# EAGLE board Wheel Speed Sensor rev1.1 (EAGLE 9.5.0)
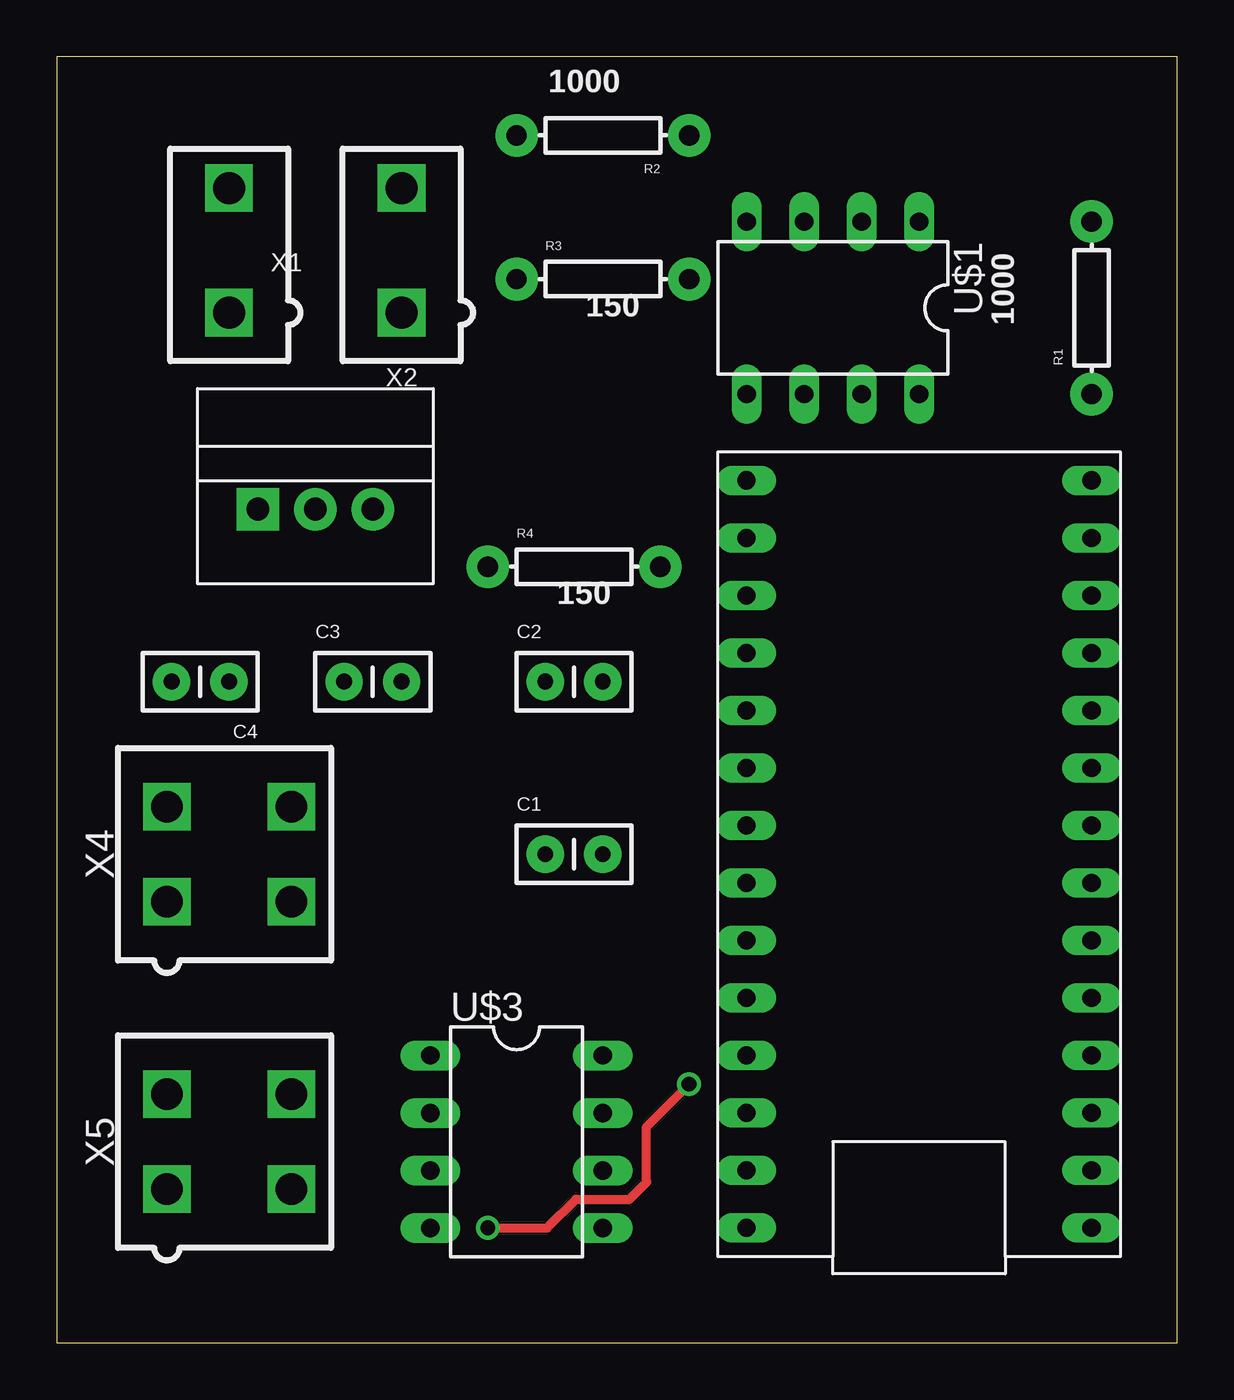
[diagram p0: board, top side]
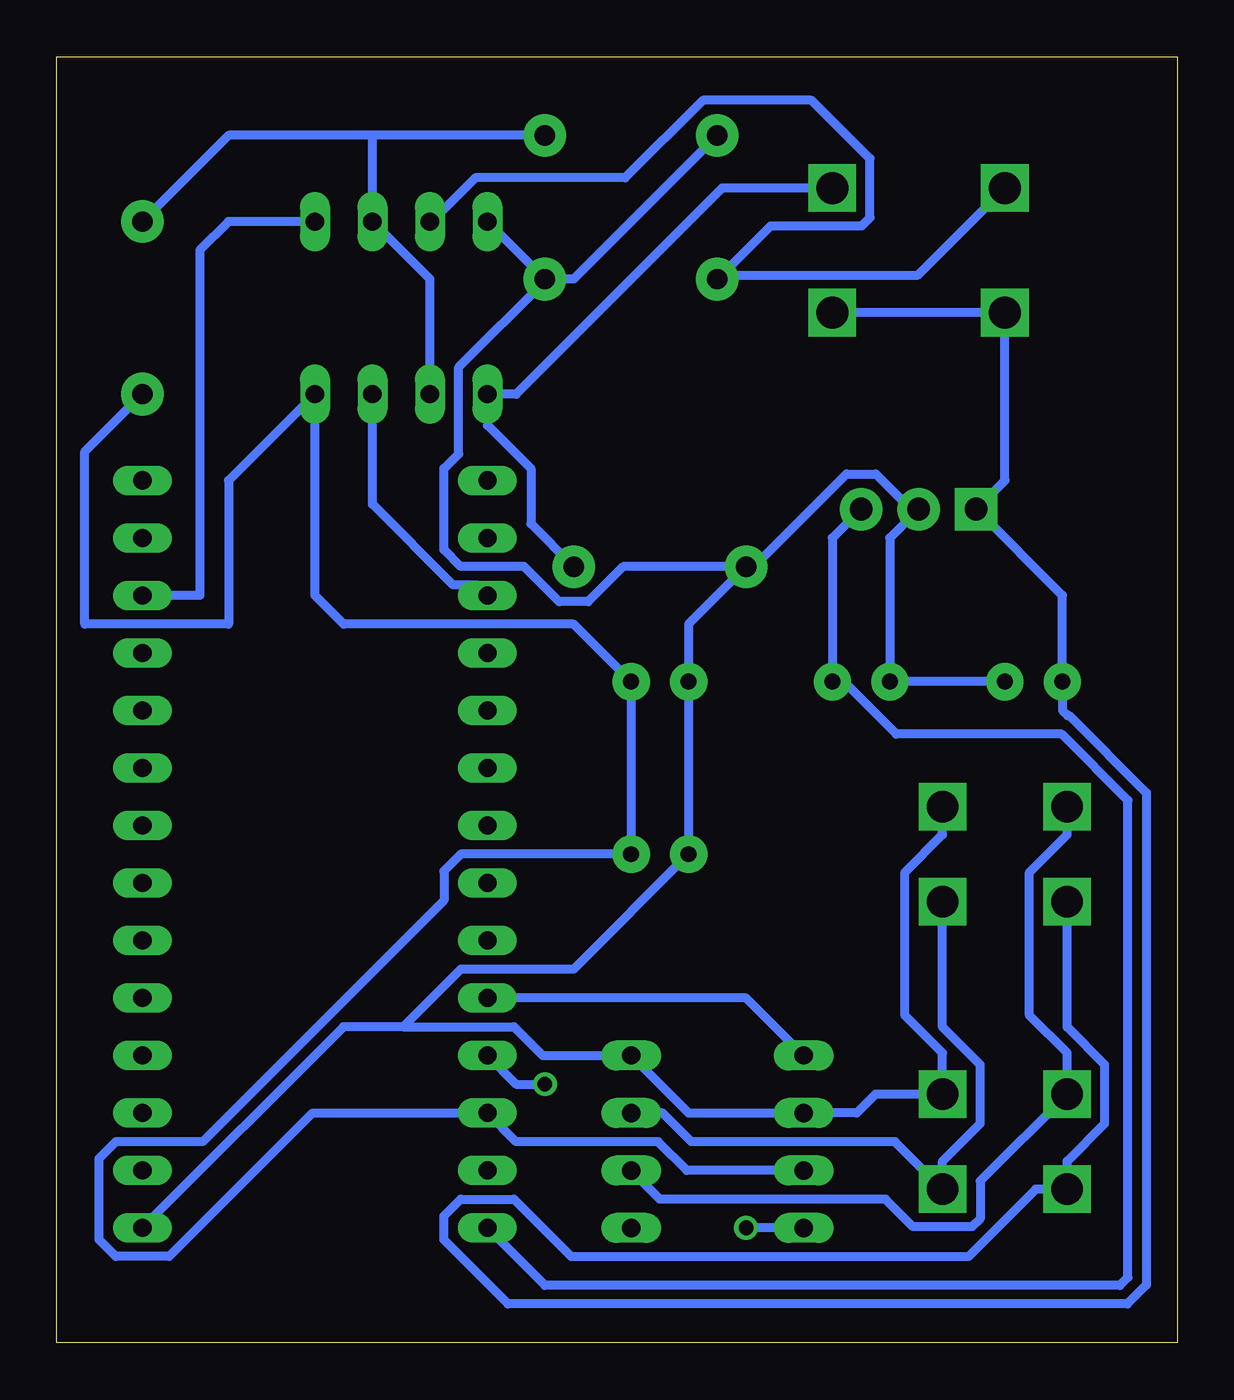
[diagram p1: board, bottom side, seen from below]

Size 49.51 x 56.82 mm. Coordinates in mm from the lower left corner, seen from the top.
Outline: 0,0 49.51,0 49.51,56.82 0,56.82 0,0
Copper layers (1*16): Top 0.035mm / dielectric 1.5mm / Bottom 0.035mm
Design rules "default *": minimum track width 16mil, minimum drill 0.35mm, track to track 16mil, track to pad 16mil, pad to pad 16mil, via to via 16mil, smd to smd 16mil, copper to edge 40mil, drill to drill 6mil, minimum pad ring 10mil, minimum via ring 8mil, stop-mask expansion 4mil, vias tented up to drill 0mil, thermal gap 10mil

## Footprints (pad centres in the part's own frame; a part is rotated, then mirrored left to right if it is on the bottom)
CAP-PTH-SMALLEZ = drill 0.7 pad 1.651: 1 0,0; 2 2.54,0
AXIAL-0.3 = drill 0.9 pad 1.88: P$1 -3.81,0; P$2 3.81,0
DIL08 = drill 0.813 long: 1 -3.81,-3.81; 2 -1.27,-3.81; 3 1.27,-3.81; 4 3.81,-3.81; 5 3.81,3.81; 6 1.27,3.81; 7 -1.27,3.81; 8 -3.81,3.81
TEENSY_3.2_SIMPLE = drill 0.8 long: 3.3V 16.51,29.21; A0 16.51,3.81; A1 16.51,6.35; A2 16.51,8.89; A3 16.51,11.43; A4 16.51,13.97; A5 16.51,16.51; A6 16.51,19.05; A7 16.51,21.59; A8 16.51,24.13; A9 16.51,26.67; AGND 16.51,31.75; D0(RX1) 1.27,31.75; D1(TX1) 1.27,29.21; D2 1.27,26.67; D3(CANTX) 1.27,24.13; D4(CANRX) 1.27,21.59; D5 1.27,19.05; D6 1.27,16.51; D7(RX3) 1.27,13.97; D8(TX3) 1.27,11.43; D9(RX2) 1.27,8.89; D10(TX2) 1.27,6.35; D11 1.27,3.81; D12 1.27,1.27; D13 16.51,1.27; GND 1.27,34.29; VIN 16.51,34.29
OKI-78SR = drill 1 pad 1.88 square: 1 -2.54,0 | drill 1 pad 1.88: 2 0,0; 3 2.54,0
MINIFIT_5566-2 = drill 1.4 square: 1 0,-2.75; 2 0,2.75
MINIFIT_5566-4 = drill 1.4 square: 1 2.1,-2.75; 2 -2.1,-2.75; 3 2.1,2.75; 4 -2.1,2.75

## Placement (x,y rotation side)
C1  1uF  [CAP-PTH-SMALLEZ]  21.59,21.59 0 top
C2  1uF  [CAP-PTH-SMALLEZ]  21.59,29.21 0 top
C3  [CAP-PTH-SMALLEZ]  12.7,29.21 0 top
C4  [CAP-PTH-SMALLEZ]  7.62,29.21 180 top
R1  1000  [AXIAL-0.3]  45.72,45.72 90 top
R2  1000  [AXIAL-0.3]  24.13,53.34 180 top
R3  150  [AXIAL-0.3]  24.13,46.99 0 top
R4  150  [AXIAL-0.3]  22.86,34.29 0 top
U$1  MCP6002PDIP  [DIL08]  34.29,45.72 180 top
U$2  TEENSY_3.2_SIMPLE  [TEENSY_3.2_SIMPLE]  46.99,39.37 180 top
U$3  MCP2551DIL  [DIL08]  20.32,8.89 270 top
U$4  OKI-78SR-5  [OKI-78SR]  11.43,36.83 0 top
X1  Sensor 1  [MINIFIT_5566-2]  7.62,48.26 0 top
X2  Sensor 2  [MINIFIT_5566-2]  15.24,48.26 0 top
X4  CONNECTOR-4  [MINIFIT_5566-4]  7.62,21.59 270 top
X5  CONNECTOR-4  [MINIFIT_5566-4]  7.62,8.89 270 top

## Library data of the parts
C1-C4 R1-R4 U$1-U$4 = HyTechDevices
X1 X2 = HyTechDevices; OC_FARNELL: 1822072; OC_NEWARK: unknown
X4 X5 = HyTechDevices; OC_FARNELL: unknown; OC_NEWARK: unknown

## Nets
3.3V: C1.2 C2.2 R1.P$1 U$1.8 U$2.3.3V U$3.3
5V: C3.2 U$2.VIN U$4.3
CANH: U$3.7 X4.3 X5.3
GND: C1.1 C2.1 C3.1 C4.1 R2.P$2 R3.P$2 R4.P$1 U$1.4 U$2.GND U$3.2 U$3.8 U$4.2 X4.4 X5.4
N$2: R1.P$2 R2.P$1 U$1.2 U$1.6
N$3: U$3.6 X4.2 X5.2
N$4: R3.P$1 U$1.3 X1.2
N$5: U$1.7 U$2.A1
N$6: U$1.1 U$2.D10(TX2)
N$8: R4.P$2 U$1.5 X2.2
RX: U$2.A9 U$3.4
TX: U$2.A8 U$3.1
VIN: C4.2 U$4.1 X1.1 X2.1 X4.1 X5.1

## Tracks (layer width: path | path; a pad name or v marks a point on that pad's centre or on a via)
3.3V
  Bottom 0.406: R1.P$1 48.26,39.37 48.26,31.75 41.91,31.75 41.91,38.1 U$1.8 38.1,33.02 36.83,31.75 26.67,31.75 C2.2 C1.2 31.65,21.59 32.4,20.84 32.4,19.55 43.07,8.88 46.9,8.88 47.64,8.14 47.64,4.56 46.9,3.82 44.54,3.82 38.2,10.16 U$2.3.3V 29.21,8.89 22.94,8.89 21.67,7.62 U$3.3
5V
  Bottom 0.406: U$4.3 15.24,35.56 C3.2 14.73,29.21 12.42,26.9 5.12,26.9 2.18,23.97 2.18,2.9 2.54,2.54 27.94,2.54 U$2.VIN
CANH
  Bottom 0.406: U$3.7 22.74,10.16 21.47,8.89 12.47,8.89 X5.3 10.37,8.03 8.71,9.69 8.71,12.29 10.37,13.95 X4.3
GND
  Bottom 0.406: C4.1 C3.1 12.7,35.56 U$4.2 11.78,36.83 13.33,38.38 14.61,38.38 18.7,34.29 R4.P$1 | R4.P$1 21.59,31.75 C2.1 C1.1 26.68,16.5 31.66,16.5 34.2,13.96 | R2.P$2 26.67,46.99 R3.P$2 | R3.P$2 27.94,46.91 31.75,43.1 31.75,39.27 32.4,38.62 32.4,35.04 31.66,34.3 28.87,34.3 27.31,32.74 26.03,32.74 24.48,34.29 R4.P$1 | U$1.4 R3.P$2 | 34.2,13.96 29.3,13.96 28.04,12.7 U$3.8 21.59,10.16 U$3.2 14.16,10.16 13.33,10.99 X5.4 10.37,12.8 12.03,14.46 12.03,20.79 10.37,22.45 X4.4 | U$2.GND 36.84,13.96 34.2,13.96
N$2
  Bottom 0.406: R2.P$1 35.56,53.34 | 35.56,53.34 41.91,53.34 R1.P$2 | 35.56,53.34 U$1.2 33.02,46.99 U$1.6
N$3
  Bottom 0.406: U$3.6 22.86,6.35 12.89,6.35 11.67,5.13 9.07,5.13 8.71,5.49 8.71,7.15 X5.2 4.87,12.8 6.53,14.46 6.53,20.79 4.87,22.45 X4.2
N$4
  Bottom 0.406: X1.2 11.46,47.17 20.14,47.17 R3.P$1 17.96,49.35 13.94,49.35 13.58,49.71 13.58,52.31 16.16,54.89 20.96,54.89 24.39,51.46 31.01,51.46 32.94,49.53 U$1.3
N$5
  Bottom 0.406: U$2.A1 30.94,33.48 31.99,33.48 35.56,37.05 U$1.7
N$6
  Bottom 0.406: U$1.1 41.91,49.53 43.18,48.26 43.18,33.02 U$2.D10(TX2)
N$8
  Bottom 0.406: R4.P$2 28.56,36.18 28.56,38.62 30.48,40.54 U$1.5 29.21,41.91 20.11,51.01 X2.2
RX  (via drill 0.65)
  Top 0.406: v27.94,11.43 26.06,9.55 26.06,7.09 25.32,6.35 22.94,6.35 21.67,5.08 v19.05,5.08
  Bottom 0.406: U$3.4 v19.05,5.08 | U$2.A9 29.21,11.43 v27.94,11.43
TX
  Bottom 0.406: U$3.1 19.05,15.24 U$2.A8
VIN
  Bottom 0.406: X2.1 X1.1 7.62,38.1 U$4.1 5.08,33.02 C4.2 5.08,27.94 4.85,27.71 4.78,27.71 1.37,24.3 1.37,2.56 2.2,1.73 29.57,1.73 32.4,4.56 32.4,5.6 31.66,6.34 29.3,6.34 26.77,3.81 9.24,3.81 6.26,6.79 X5.1 4.87,8.03 3.21,9.69 3.21,12.29 4.87,13.95 X4.1